# Altium PCB BM1397_TESTBED.PcbDoc
Units mm, origin at the board's own origin, x right, y up, seen from the top; angles counter-clockwise.
Board outline 120.02 x 120.02 mm, 2 copper layers (Top Layer, Bottom Layer); 70 components, 45 nets, 259 pads, 1007 vias.
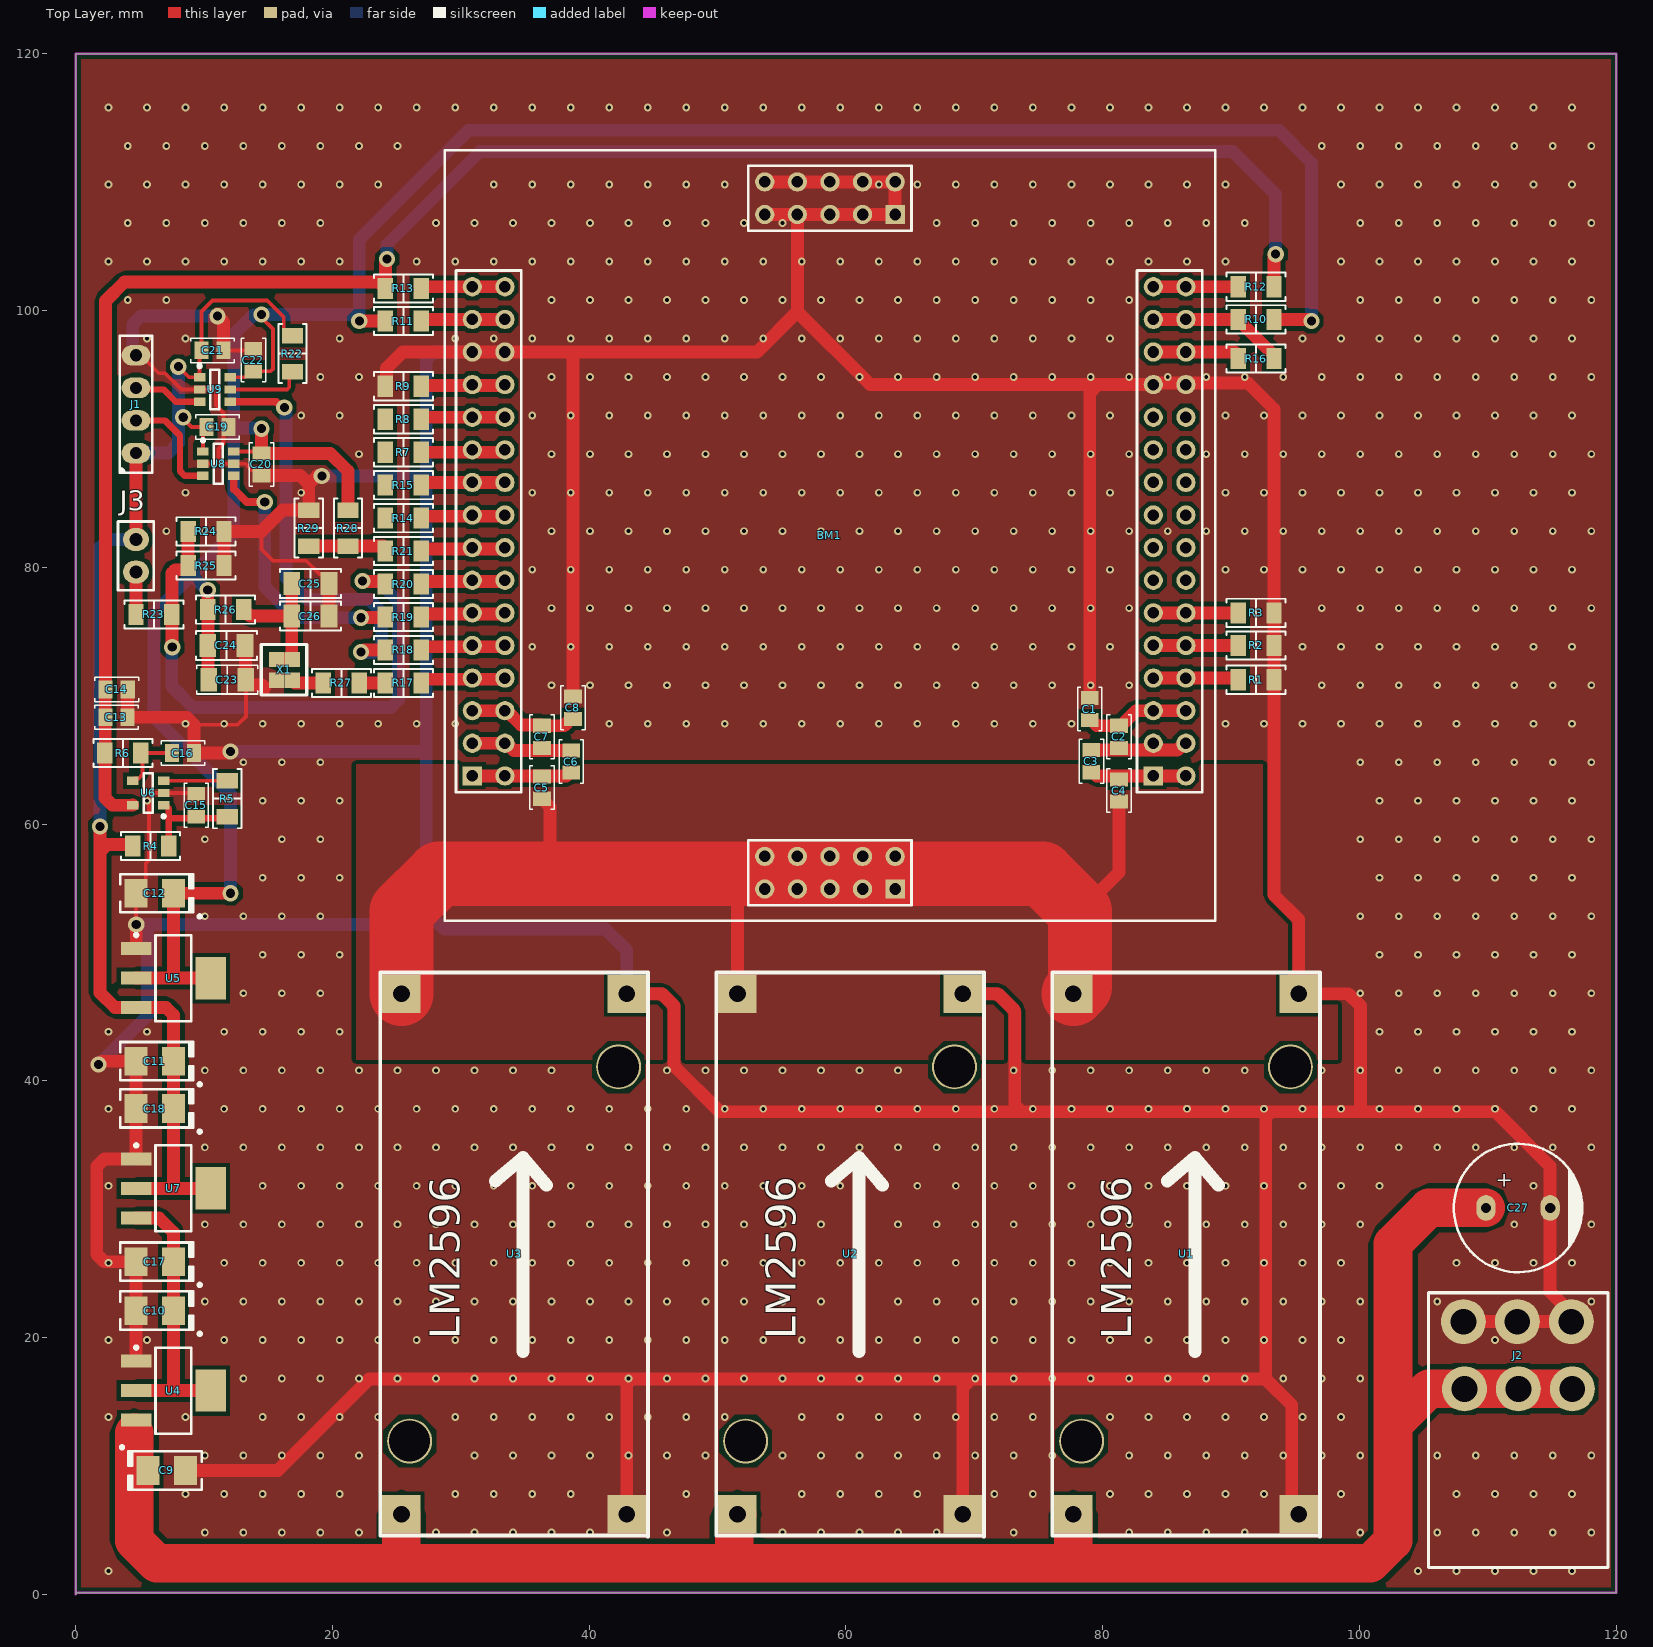
[diagram p0: Top Layer view]
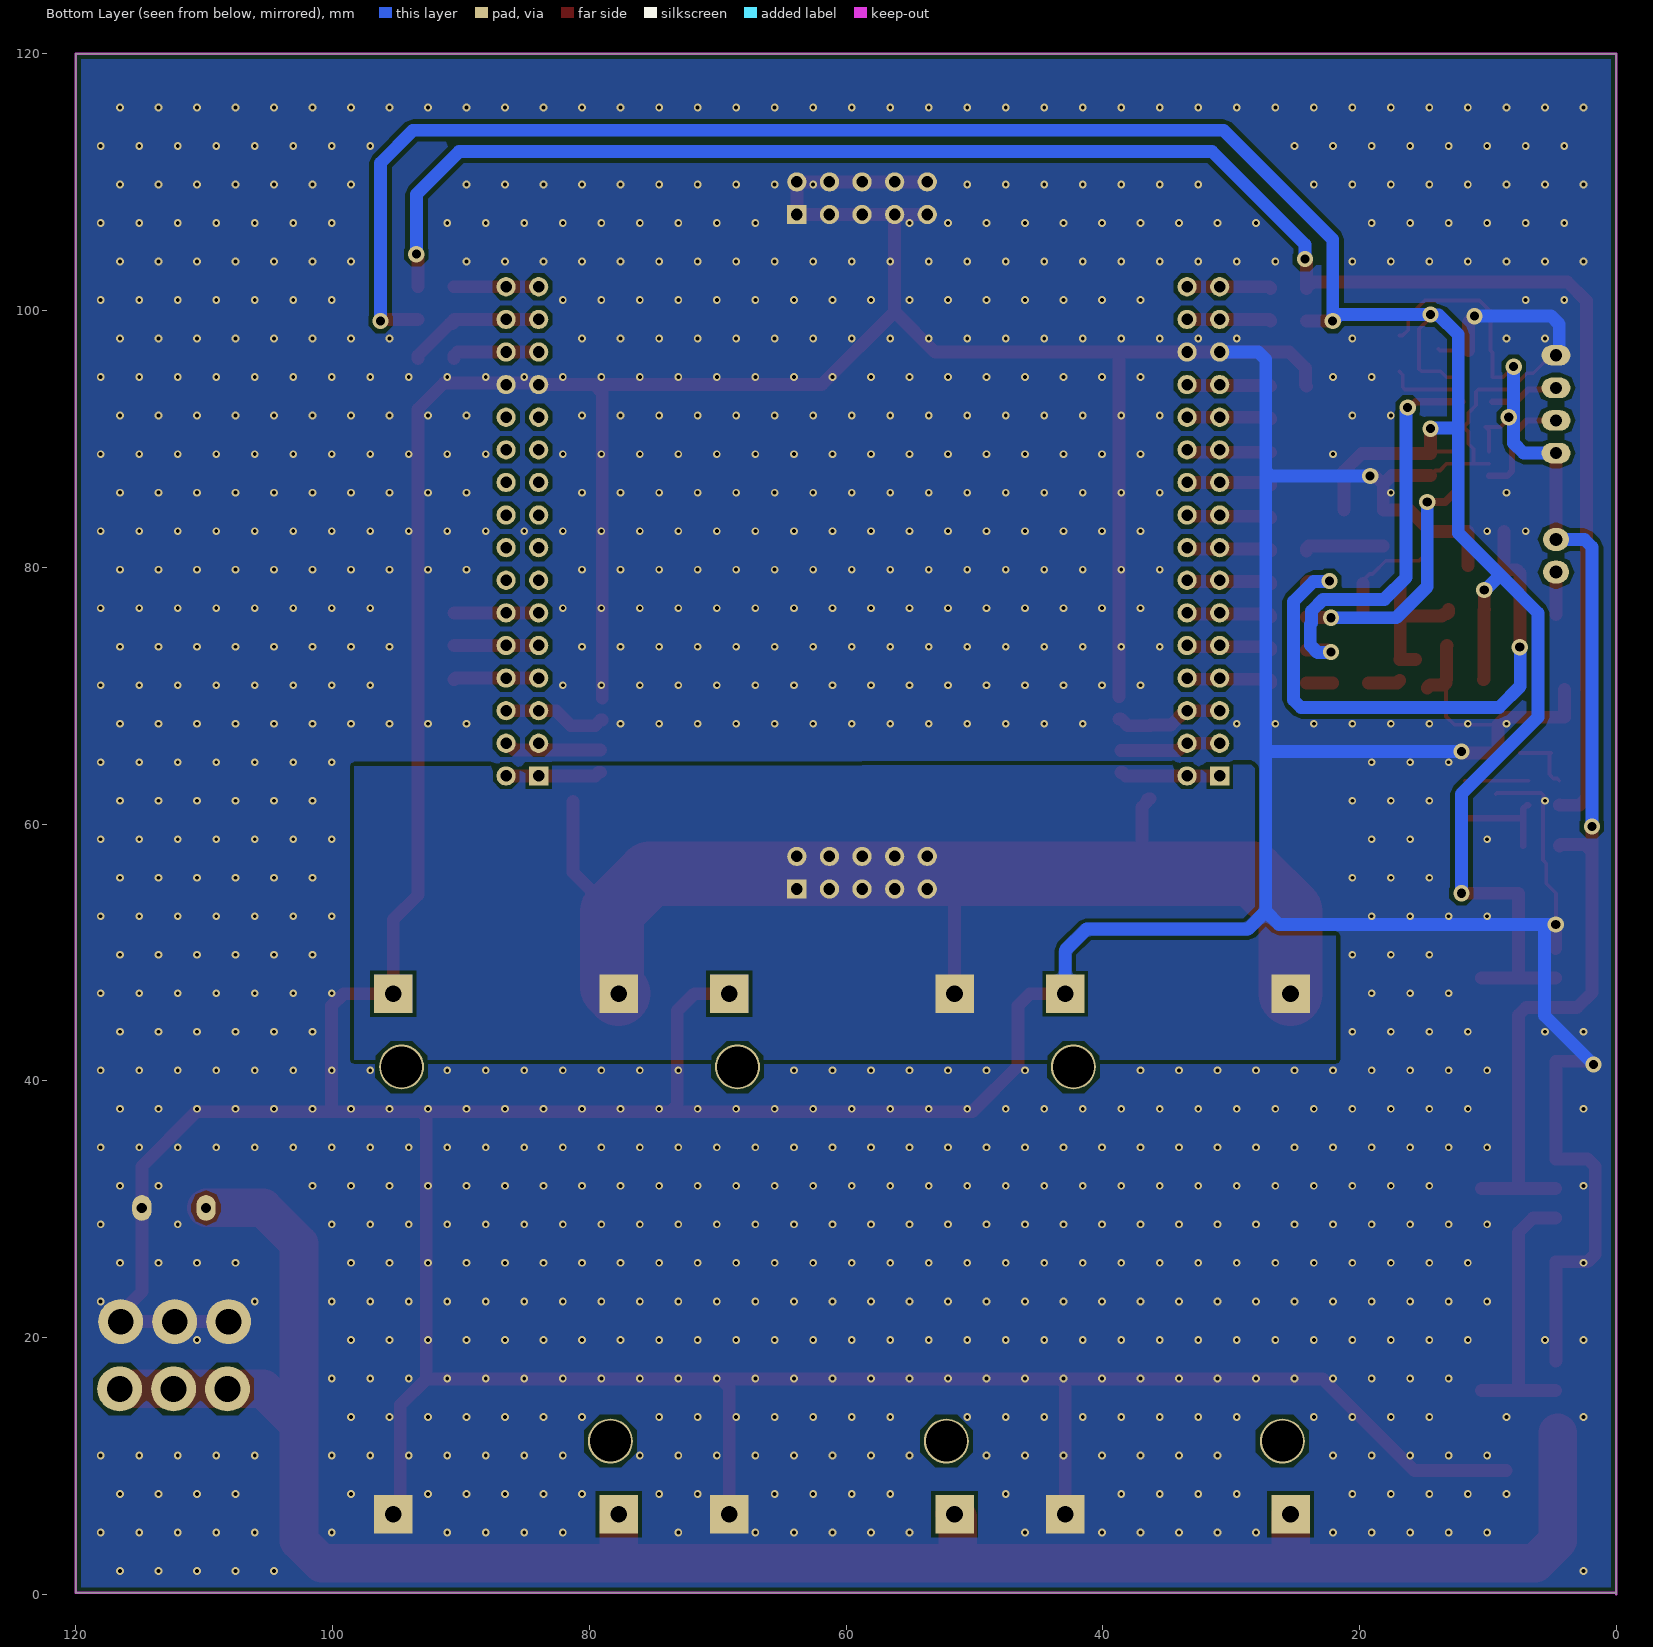
[diagram p1: Bottom Layer view, seen from below]
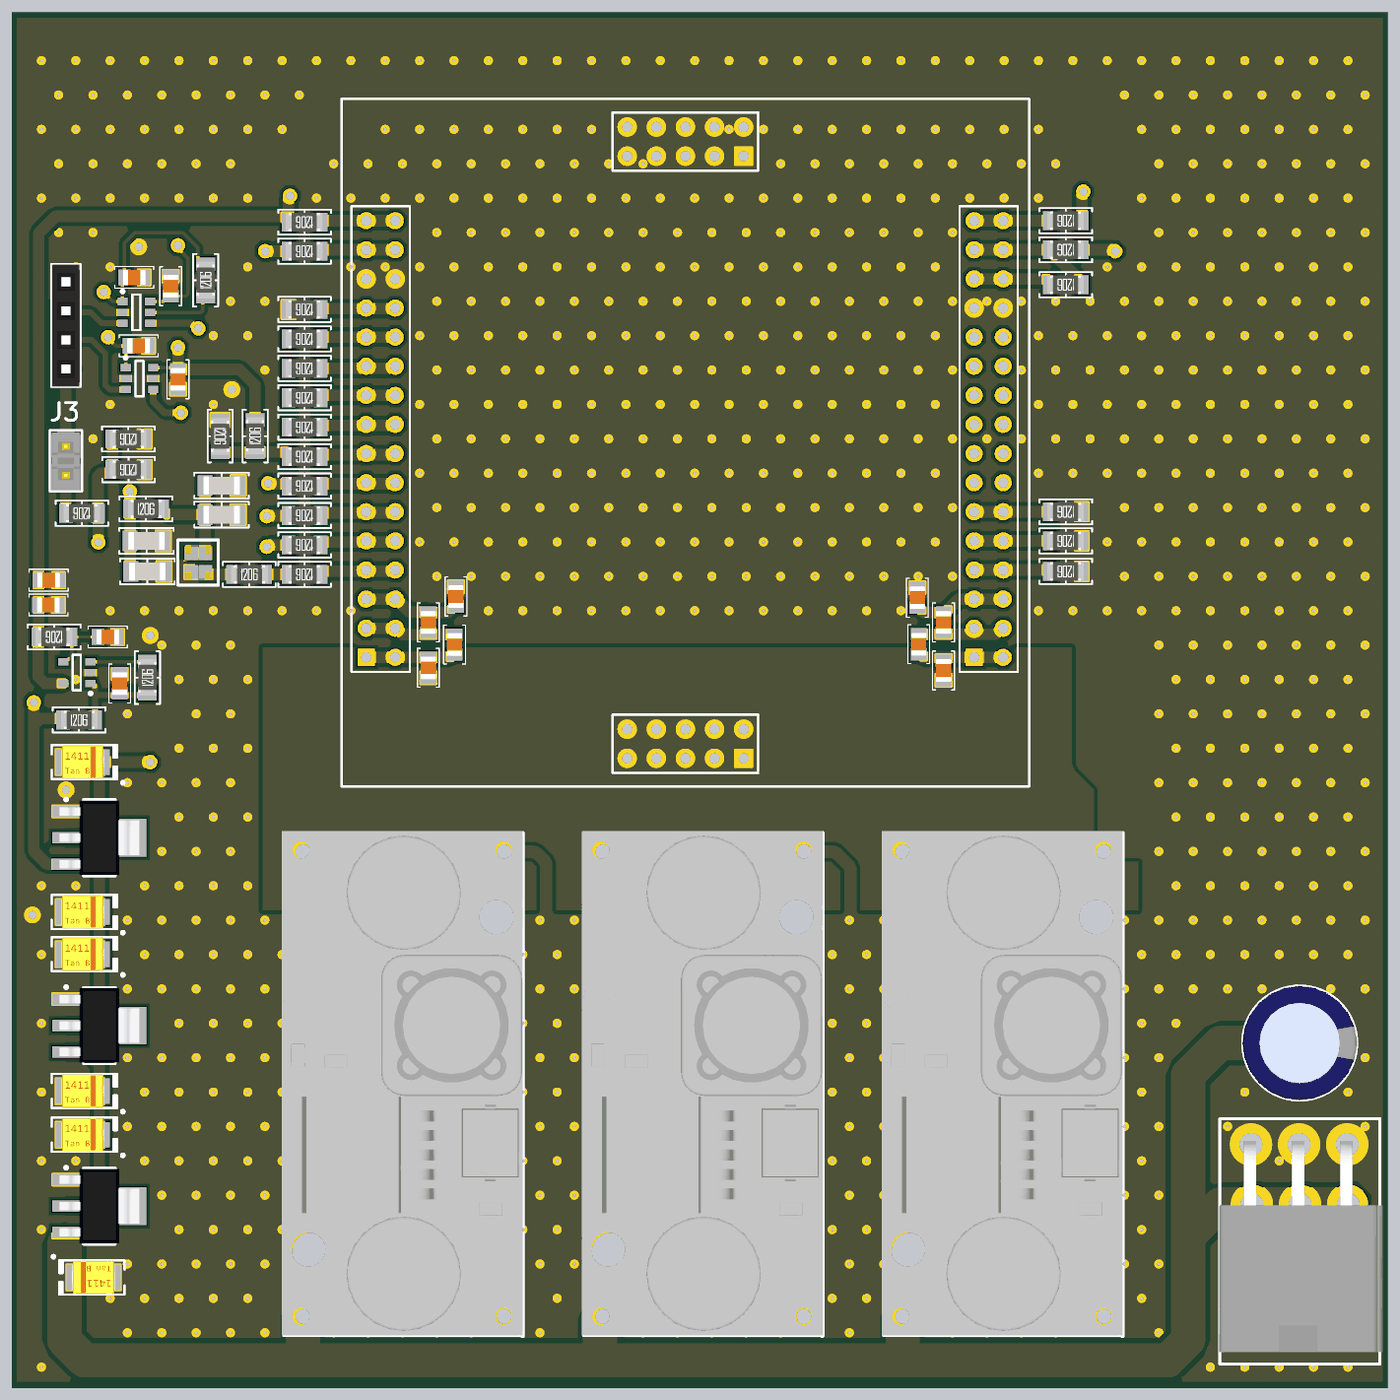
[diagram p2: 3D render of the assembled board from above, using the file's embedded part models]

## Layer stack, top to bottom
Top Solder: solder mask 0.0102, Solder Resist, Dk 3.5
Top Layer: signal copper 0.0356
Dielectric 1: dielectric 0.32, FR-4, Dk 4.8
Bottom Layer: signal copper 0.0356
Bottom Solder: solder mask 0.0102, Solder Resist, Dk 3.5

## Board outline
0,0 0,120.015 120.015,120.015 120.015,0.127 0,0.127

## Design rules (kind name [scope] priority, off if disabled: settings)
Clearance [All] p1: gap=0.3 ignorepadtopadclearanceinfootprint=FALSE
ComponentClearance [All] p1: gap=0 collisioncheckmode=3 verticalgap=2540 showdistances=FALSE
PolygonConnect [All] p1: connectstyle=Direct reliefconductorwidth=0.254 reliefentries=4 polygonreliefangle="90 Angle" airgapwidth=0.254
RoomDefinition BM1397_TESTBED [InComponentClass('BM1397_TESTBED')] p1: confinementstyle=ConfineOut formatcopy=TRUE lockcomponents=FALSE outline 177.165,186.944 445.516,186.944 445.516,314.452 177.165,314.452
RoutingVias [All] p1: holewidth=0.711 width=1.27 viastyle="Through Hole" minholewidth=0.711 minwidth=1.27 maxholewidth=0.711 maxwidth=1.27
SolderMaskExpansion [All] p1: expansion=0.102 istentingtop=FALSE
Width [All] p1: maxlimit=5 minlimit=0.3 preferedwidth=1
29 further rules are at their usual default settings.

## Components (designator, comment, footprint, x,y, rotation, side; value= is the part's Value field where it differs from the comment)
BM1 "BM1397" CONNECTOR 88.757,52.484 r180 top locked
C1 "1uF" CAP_SMD_0805 78.994,68.961 r270 top
C2 "1uF" CAP_SMD_0805 81.28,66.802 r270 top
C3 "1uF" CAP_SMD_0805 79.121,64.897 r270 top
C4 "1uF" CAP_SMD_0805 81.28,62.611 r270 top
C5 "1uF" CAP_SMD_0805 36.322,62.839 r90 top
C6 "1uF" CAP_SMD_0805 38.608,64.871 r90 top
C7 "1uF" CAP_SMD_0805 36.322,66.802 r90 top
C8 "1uF" CAP_SMD_0805 38.735,69.062 r90 top
C9 "10uF" CAP-TAN-CASE-B 7.112,9.652 r0 top
C10 "22uF" CAP-TAN-CASE-B 6.167,22.098 r180 top
C11 "10uF" CAP-TAN-CASE-B 6.167,41.529 r180 top
C12 "22uF" CAP-TAN-CASE-B 6.167,54.61 r180 top
C13 "10nF" CAP_SMD_0805 3.175,68.326 r180 top
C14 "1uF" CAP_SMD_0805 3.201,70.485 r180 top
C15 "1uF" CAP_SMD_0805 9.398,61.468 r270 top
C16 "10nF" CAP_SMD_0805 8.356,65.532 r180 top
C17 "10uF" CAP-TAN-CASE-B 6.167,25.908 r180 top
C18 "22uF" CAP-TAN-CASE-B 6.167,37.846 r180 top
C19 "1uF" CAP_SMD_0805 11.049,90.932 r180 top
C20 "1uF" CAP_SMD_0805 14.478,88.011 r270 top
C21 "1uF" CAP_SMD_0805 10.668,96.901 r180 top
C22 "1uF" CAP_SMD_0805 13.843,96.139 r90 top
C23 "120nF" CAP_SMD_1206 11.811,71.247 r0 top
C24 "1.2uF" CAP_SMD_1206 11.737,73.914 r0 top
C25 "120nF" CAP_SMD_1206 18.288,78.74 r0 top
C26 "1.2uF" CAP_SMD_1206 18.288,76.2 r0 top
C27 "1000uF" CAP_POL 112.355,30.099 r0 top
J1 "HEADRE1*4" HEADER-1x4 4.699,92.71 r90 top
J2 "ATX_6_PIN" "ATX 6" 112.346,18.625 r0 top
J3 "jumper" jumper_2pin 4.699,80.899 r270 top
R1 "0R" RES-SMD-1206 91.948,71.247 r180 top
R2 "0R" RES-SMD-1206 91.948,73.914 r180 top
R3 "0R" RES-SMD-1206 91.948,76.454 r180 top
R4 "4.99R" RES-SMD-1206 5.842,58.293 r0 top
R5 "10K" RES-SMD-1206 11.811,61.979 r90 top
R6 "0R" RES-SMD-1206 3.683,65.532 r180 top
R7 "0R" RES-SMD-1206 25.527,88.971 r180 top
R8 "0R" RES-SMD-1206 25.527,91.539 r180 top
R9 "0R" RES-SMD-1206 25.527,94.107 r180 top
R10 "0R" RES-SMD-1206 91.948,99.314 r180 top
R11 "0R" RES-SMD-1206 25.527,99.187 r180 top
R12 "0R" RES-SMD-1206 91.948,101.854 r180 top
R13 "0R" RES-SMD-1206 25.527,101.727 r180 top
R14 "0R" RES-SMD-1206 25.527,83.834 r180 top
R15 "0R" RES-SMD-1206 25.527,86.402 r180 top
R16 "0R" RES-SMD-1206 91.948,96.266 r180 top
R17 "0R" RES-SMD-1206 25.527,70.993 r180 top
R18 "0R" RES-SMD-1206 25.527,73.561 r180 top
R19 "0R" RES-SMD-1206 25.527,76.129 r180 top
R20 "0R" RES-SMD-1206 25.527,78.698 r180 top
R21 "0R" RES-SMD-1206 25.527,81.266 r180 top
R22 "4.7K" RES-SMD-1206 16.891,96.647 r90 top
R23 "3.3K" RES-SMD-1206 6.099,76.327 r180 top
R24 "3.3K" RES-SMD-1206 10.157,82.804 r180 top
R25 "4.7K" RES-SMD-1206 10.16,80.137 r180 top
R26 "0R" RES-SMD-1206 11.684,76.708 r0 top
R27 "0R" RES-SMD-1206 20.698,70.993 r0 top
R28 "0R" RES-SMD-1206 21.209,83.058 r90 top
R29 "0R" RES-SMD-1206 18.161,83.058 r270 top
U1 "LM2596S" LM2596S 96.919,4.588 r90 top
U2 "LM2596S" LM2596S 70.75,4.588 r90 top
U3 "LM2596S" LM2596S 44.581,4.588 r90 top
U4 "AMS1117" AMS1117 7.62,15.875 r270 top
U5 "AMS1117" AMS1117 7.62,48.006 r270 top
U6 "SGM2036" SOT23-5PIN 5.654,62.427 r180 top
U7 "AMS1117" AMS1117 7.62,31.623 r270 top
U8 "LEVER SHIFTER" SOT23-6PIN 11.119,88.072 r0 top
U9 "LEVER SHIFTER" SOT23-6PIN 10.852,93.853 r0 top
X1 "25MHz" XTALL 16.256,72.009 r90 top

## Footprints (in the part's own frame and the unit in brackets; to place one, negate y for a bottom-side part, rotate by r counter-clockwise, add the part's x,y. Pads: shape width x height; smd on the part's side, far side on the other; paste and mask are expansions set on the pad)
AMS1117 [mm]
  rect 1x2.4 smd: 1(-2.3,-2.9) 2(0,-2.9) 3(2.3,-2.9)
  rect 3.3x2.4 smd: 4(0,2.9)
  silkscreen extent -3.47,-3.02 3.35,1.4, body extent -3.24,-3.49 3.24,3.49, height 1.64
"ATX 6" [mm]
  round 3.5 hole 2: 1(-4.159,-2.623) 2(0.041,-2.623) 3(4.24,-2.623) 4(4.16,2.623) 5(-0.04,2.623) 6(-4.24,2.623)
  silkscreen extent -6.96,-16.52 7.01,4.88, body extent -7.02,-15.49 7.28,2.94, height 11.1
CAP-TAN-CASE-B [mm]
  rect 1.8x2.23 smd: 1(-1.46,0) 2(1.46,0)
  silkscreen extent -3.62,-1.5 2.71,1.92, body extent -1.87,-1.45 1.86,1.45, height 2
CAP_POL [mm]
  oval 1.5x2 hole 0.8: 1(-2.5,0) 2(2.5,0)
  silkscreen extent -5,-5 5,5, body extent -5,-5 5,5, height 12.7
CAP_SMD_0805 [mm]
  rect 1.1x1.38 smd: 1(-0.863,0) 2(0.863,0)
  silkscreen extent -1.7,-0.95 1.7,0.95, body extent -1,-0.67 1,0.67, height 0.63
CAP_SMD_1206 [mm]
  rect 1.3x1.8 smd: 1(-1.45,0) 2(1.45,0)
  silkscreen extent -2.37,-1.12 2.37,1.12, body extent -1.6,-0.8 1.6,0.8, height 1.2
CONNECTOR [mm]
  round 1.5 hole 0.9: 1(2.27,-11.27) 2(2.27,-13.81) 2(4.81,-13.81) 3(2.27,-16.35) 3(4.81,-16.35) 4(2.27,-18.89) 4(4.81,-18.89) 5(2.27,-21.43) 5(4.81,-21.43) 6(2.27,-23.97) 6(4.81,-23.97) 7(2.27,-26.51) 7(4.81,-26.51) 8(2.27,-29.05) 8(4.81,-29.05) 9(2.27,-31.59) 9(4.81,-31.59) 10(2.27,-34.13) 10(4.81,-34.13) 11(2.27,-36.67) 11(4.81,-36.67) 12(2.27,-39.21) 12(4.81,-39.21) 13(2.27,-41.75) 13(4.81,-41.75) 14(2.27,-44.29) 14(4.81,-44.29) 15(2.27,-46.83) 15(4.81,-46.83) 16(2.27,-49.37) 16(4.81,-49.37) 17(55.317,-49.37) 17(57.857,-49.37) 18(55.317,-46.83) 18(57.857,-46.83) 19(55.317,-44.29) 19(57.857,-44.29) 20(55.317,-41.75) 20(57.857,-41.75) 21(55.317,-39.21) 21(57.857,-39.21) 22(55.317,-36.67) 22(57.857,-36.67) 23(55.317,-34.13) 23(57.857,-34.13) 24(55.317,-31.59) 24(57.857,-31.59) 25(55.317,-29.05) 25(57.857,-29.05) 26(55.317,-26.51) 26(57.857,-26.51) 27(55.317,-23.97) 27(57.857,-23.97) 28(55.317,-21.43) 28(57.857,-21.43) 29(55.317,-18.89) 29(57.857,-18.89) 30(55.317,-16.35) 30(57.857,-16.35) 31(55.317,-13.81) 31(57.857,-13.81) 32(55.317,-11.27) 33(24.92,-57.54) 33(27.46,-57.54) 33(27.46,-55) 33(30,-57.54) 33(30,-55) 33(32.54,-57.54) 33(32.54,-55) 33(35.08,-57.54) 33(35.08,-55) 34(24.92,-5) 34(27.46,-5) 34(27.46,-2.46) 34(30,-5) 34(30,-2.46) 34(32.54,-5) 34(32.54,-2.46) 34(35.08,-5) 34(35.08,-2.46)
  rect 1.5x1.5 hole 0.9: 1(4.81,-11.27) 32(57.857,-11.27) 33(24.92,-55) 34(24.92,-2.46)
  silkscreen extent 0,-60 60,0
HEADER-1x4 [mm]
  oval 1.6x2.25 hole 0.95: 1(-3.81,0) 2(-1.27,0) 3(1.27,0) 4(3.81,0)
  silkscreen extent -5.34,-1.27 5.34,1.27, body extent -5.33,-1.21 5.33,1.21, height 8.51
jumper_2pin [mil]
  oval 70x80 hole 40: 1(-50,0) 2(50,0)
  silkscreen extent -105,-55 105,55, body extent -100,-50 100,50, height 337
LM2596S [mm]
  round 3.5 hole 3.2: 0(7.35,18.56) 0(36.5,2.29)
  rect 3x3 hole 1.3: 1(1.65,19.2) 2(1.65,1.65) 3(42.2,19.2) 4(42.2,1.65)
  silkscreen extent -0.08,0 43.85,20.85, body extent 0,0.03 44,21.03, height 12.68
RES-SMD-1206 [mm]
  rect 1.2x1.65 smd: 1(-1.4,0) 2(1.4,0)
  silkscreen extent -2.3,-1.1 2.3,1.1, body extent -1.57,-0.8 1.63,0.8, height 0.6
SOT23-5PIN [mm]
  rect 0.9x0.65 smd: 1(-1.2,0.95) 2(-1.2,0) 3(-1.2,-0.95) 4(1.2,-0.95) 5(1.2,0.95)
  silkscreen extent -1.33,-1.55 0.35,1.95, body extent -0.9,-1.55 0.9,1.55, height 1.45
SOT23-6PIN [mm]
  rect 0.9x0.65 smd: 1(-1.2,0.95) 2(-1.2,0) 3(-1.2,-0.95) 4(1.2,-0.95) 5(1.2,0) 6(1.2,0.95)
  silkscreen extent -1.32,-1.55 0.35,1.95, body extent -0.9,-1.55 0.9,1.55, height 1.45
XTALL [mm]
  rect 1.2x1.2 smd: 1(0.813,-0.612) 2(-0.813,0.613) 3(-0.813,-0.612) 4(0.813,0.613)
  silkscreen extent -1.96,-1.76 1.98,1.8, body extent -1.6,-1.27 1.6,1.23, height 0.87

## Part data
BM1: library part BM1397_0
C1 C2 C3 C4 C5 C6 C7 C8 C13 C14 C15 C16 C19 C20 C21 C22 C23 C24 C25 C26: library part CAP
C9 C10 C11 C12 C17 C18 C27: library part "POLARIZED CAP"
J1: library part HEADER-1x4
J2: "ATX PWR CONN 6 PIN"
J3: library part Jumper_2
R1 R2 R3 R4 R5 R6 R7 R8 R9 R10 R11 R12 R13 R14 R15 R16 R17 R18 R19 R20 R21 R22 R23 R24 R25 R26 R27 R28 R29: library part RES
U1 U2 U3: library part LM2596s, "DC-DC CONVERTER"
U8 U9: library part SN74LVC1T45
X1: library part XTALL

## Via types
v1: diameter 0.6, hole 0.3, Top Layer to Bottom Layer, 985 vias
v2: diameter 1.27, hole 0.711, Top Layer to Bottom Layer, 22 vias

## Nets (pads, with @x,y where several pads share a name; then routed paths per layer and width w, separated by ;. In a path a pad name is that pad's centre, name@x,y a point inside that pad or via, vN(x,y) a via of type N, cw(c..) or ccw(c..) an arc to the next point about the centre after c; other vN are vias at no path point)
0.8V: C13.2 C14.2 R6.2 R12.1 R13.2 U6.5 | length 148
  Top Layer w1: U6.5 4.445,61.468 2.869,61.468 2.283,62.054 R6.2 2.31,65.56 C13.2 2.31,70.457 C14.2 2.338,100.763 3.81,102.235 23.619,102.235 23.802,102.052 24.027,102.052 R13.2@24.127,101.952 ; R13.2 R13.2@24.127,101.952 ; v2(24.257,104.013) 24.257,103.94 24.127,103.81 R13.2@24.127,101.952 ; R12.1 93.348,104.27 v2(93.472,104.394)
  Bottom Layer w1: v2(24.257,104.013) 24.257,105.156 31.496,112.395 90.14,112.395 93.472,109.063 v2(93.472,104.394)
1.8V: C12.1 C20.1 C22.1 C23.1 C24.1 R10.1 R11.2 R26.1 R28.2 U5.2 U5.4 U8.6 U9.6 | length 212.2
  Top Layer w0.3: U9.6 13.23,94.803 13.703,95.276 C22.1 15.191,95.276 15.367,95.452 15.367,98.552 14.478,99.441 v2(14.478,99.695) ; U8.6 14.33,89.022 C20.1
  Top Layer w1: U5.2 7.366,48.006 ; v2(10.287,78.232) 10.287,76.711 R26.1 10.323,76.67 10.323,71.285 C23.1 ; U5.4 7.366,48.006 ; v2(12.065,54.61) C12.1 7.627,48.267 7.366,48.006 ; v2(14.478,90.805) C20.1 19.838,88.874 21.209,87.503 R28.2 ; v2(22.098,99.187) R11.2 ; R10.1 96.066,99.314 96.193,99.187 v2(96.266,99.187)
  Bottom Layer w1: v2(10.287,78.232) 10.214,78.232 9.134,79.311 8.954,79.311 ; v2(12.065,54.61) 12.065,62.357 6.096,68.326 6.096,76.454 8.954,79.311 ; v2@14.405,99.695 14.353,99.643 13.835,99.643 12.319,98.128 12.319,91.059 ; v2(14.478,90.805) 14.426,90.857 12.521,90.857 12.319,91.059 ; v2(14.478,99.695) 21.517,99.695 22.025,99.187 v2(22.098,99.187) 22.098,105.537 30.607,114.046 93.726,114.046 96.266,111.506 v2(96.266,99.187) ; 8.954,79.311 12.319,82.677 12.319,91.059
3.3V: C11.1 C18.1 C19.2 C21.2 J1.1 J3.1 R4.1 R22.2 U5.3 U7.2 U7.4 U8.1 U9.1 | length 103.3
  Top Layer w0.3: v2(8.001,95.631) 8.829,94.803 U9.1 9.652,96.748 C21.2 9.805,99.922 10.663,100.78 14.927,100.78 16.216,99.491 16.216,98.497 16.666,98.047 R22.2 ; v2(8.382,91.694) 8.382,91.567 9.017,90.932 C19.2 9.919,90.665 U8.1
  Top Layer w1: v2(1.905,59.817) 1.905,57.834 ; R4.1 4.442,58.32 4.342,58.42 2.491,58.42 1.905,57.834 ; J3.1 J1.1 ; U7.2 7.493,31.623 ; U7.4 7.493,31.623 ; 1.905,57.834 1.905,46.863 3.062,45.706 U5.3 6.199,45.706 6.213,45.72 7.041,45.72 7.627,45.134 C11.1 C18.1 7.627,31.757 7.493,31.623
  Bottom Layer w1: v2(1.905,59.817) 1.905,81.583 2.491,82.169 J3.1 ; J1.1 7.239,88.9 8.001,89.662 v2(8.001,95.631)
5V: C10.1 C17.1 U4.2 U4.4 U7.3 | length 21.5
  Top Layer w1: U4.2 7.62,15.875 ; U7.3 6.491,29.323 7.627,28.187 C17.1 7.62,25.901 7.62,15.875 ; U4.4 7.62,15.875
CLK: R17.2 R27.2 | length 2
  Top Layer w1: R27.2 R17.2
GND: BM1.13 BM1.19 BM1.33 C1.1 C8.2 C9.2 C10.2 C11.2 C12.2 C13.1 C14.1 C15.1 C16.1 C17.2 C18.2 C19.1 C20.2 C21.1 C22.2 C23.2 C24.2 C25.2 C26.2 C27.2 J1.4 J2.4 J2.5 J2.6 R1.1 R2.1 R3.1 R9.2 R24.1 R25.1 R29.1 U1.2 U1.4 U2.2 U2.4 U3.2 U3.4 U4.1 U5.1 U6.2 U7.1 U8.2 U8.5 U9.2 X1.2 | length 732.3
  Top Layer w0.3: J1.4 5.08,96.52 6.477,95.123 6.975,95.123 8.245,93.853 U9.2 10.746,93.853 10.922,93.677 10.922,92.622 11.512,92.032 11.512,91.332 C19.1 11.512,90.532 11.512,89.626 11.119,89.233 11.119,88.072 ; v2@4.707,52.197 C12.2 5.457,55.36 5.457,56.932 5.715,57.19 5.715,61.976 5.688,62.003 5.688,62.251 5.864,62.427 U6.2 9.302,62.427 C15.1 ; 9.219,67.74 12.622,67.74 13.261,68.379 13.261,70.997 C23.2 ; U8.2 11.119,88.072 ; C21.1 13.742,96.901 C22.2 ; 14.475,82.804 14.475,81.41 15.367,80.518 17.96,80.518 18.988,79.49 19.238,79.49 19.738,78.99 C25.2 ; C20.2 14.078,87.548 13.743,87.548 13.219,88.072 U8.5 11.119,88.072
  Top Layer w1: v2(1.778,41.275) 2.032,41.529 C11.2 C18.2 U7.1@4.707,33.923 ; C14.1 4.051,70.472 4.051,68.339 C13.1 8.633,68.326 9.219,67.74 C16.1 11.865,65.532 11.992,65.659 v2(12.065,65.659) ; v2@4.707,52.197 v2(4.72,52.184) U5.1 ; U4.1 4.714,18.175 4.714,25.902 C17.2 2.237,25.908 1.651,26.494 1.651,33.337 2.237,33.923 U7.1 ; C9.2 15.748,9.652 22.86,16.764 v1@43.307,16.764 ; v2(11.049,99.568) 11.531,99.086 C21.1 ; R25.1 11.558,80.138 11.558,82.803 R24.1 14.475,82.804 16.129,84.458 R29.1 18.161,86.487 ; C24.2 13.224,73.877 13.224,71.284 C23.2 ; C23.2@13.261,70.997 13.411,70.847 14.497,70.847 14.732,70.612 ; C20.2 17.5,87.148 18.161,86.487 ; v2(19.177,87.122) 18.796,87.122 18.161,86.487 ; C26.2 C25.2 ; R9.2 24.227,94.207 24.227,95.523 25.478,96.774 30.9,96.774 33.44,96.774 38.862,96.774 ; C8.2 38.735,96.647 38.862,96.774 ; U3.2 42.931,16.388 v1@43.307,16.764 ; U3.4 45.668,46.788 46.609,45.847 46.609,41.148 50.165,37.592 73.66,37.592 ; BM1.33@53.677,107.484 BM1.33@56.217,107.484 ; BM1.33@53.677,110.024 56.217,110.024 58.757,110.024 61.297,110.024 63.837,110.024 63.837,107.484 61.297,107.484 58.757,107.484 BM1.33@56.217,107.484 ; U2.2 69.1,16.141 69.723,16.764 ; U2.4 71.83,46.788 73.152,45.466 73.152,38.1 73.66,37.592 ; C1.1 78.994,93.599 79.629,94.234 ; U1.2 94.726,6.781 94.726,14.748 92.71,16.764 ; J2.6 J2.5 J2.4 116.505,21.924 114.855,23.574 C27.2 114.855,33.354 110.617,37.592 100.076,37.592 ; 38.862,96.774 53.086,96.774 56.217,99.905 ; v1@43.307,16.764 69.723,16.764 ; 56.217,99.905 61.888,94.234 79.629,94.234 ; 56.217,99.905 BM1.33@56.217,107.484 ; 69.723,16.764 92.71,16.764 ; 73.66,37.592 93.091,37.592 ; 79.629,94.234 83.947,94.234 83.82,94.361 91.313,94.361 93.348,92.326 R3.1 R2.1 R1.1 93.348,54.48 95.269,52.559 U1.4 99.135,46.788 100.076,45.847 100.076,37.592 ; 92.71,16.764 92.71,37.211 93.091,37.592 ; 93.091,37.592 100.076,37.592
  Bottom Layer w1: v2(1.778,41.275) 5.588,45.085 5.588,52.184 ; J1.4 4.445,96.774 4.445,98.933 5.08,99.568 v2(11.049,99.568) ; v2(4.72,52.184) 5.588,52.184 ; v2(12.065,65.659) 27.051,65.659 27.305,65.913 ; v2(19.177,87.122) 26.924,87.122 27.305,87.503 ; BM1.19@30.9,96.774 27.891,96.774 27.305,96.188 27.305,87.503 ; U3.4 42.926,46.793 42.926,50.165 41.275,51.816 28.702,51.816 27.305,53.213 ; 5.588,52.184 26.276,52.184 27.305,53.213 ; 27.305,53.213 27.305,65.913 ; 27.305,65.913 27.305,87.503
  other v1: 2.565,1.82 104.565,1.82 107.565,1.82 110.565,1.82 113.565,1.82 116.565,1.82 10.065,4.82 13.065,4.82 16.065,4.82 19.065,4.82 22.065,4.82 28.065,4.82 31.065,4.82 34.065,4.82 37.065,4.82 40.065,4.82 46.065,4.82 55.065,4.82 58.065,4.82 61.065,4.82 64.065,4.82 67.065,4.82 73.065,4.82 82.065,4.82 85.065,4.82 88.065,4.82 91.065,4.82 100.065,4.82 106.065,4.82 109.065,4.82 112.065,4.82 115.065,4.82 118.065,4.82 8.565,7.82 11.565,7.82 14.565,7.82 17.565,7.82 20.565,7.82 29.565,7.82 32.565,7.82 35.565,7.82 38.565,7.82 47.565,7.82 56.565,7.82 59.565,7.82 62.565,7.82 65.565,7.82 71.565,7.82 74.565,7.82 80.565,7.82 83.565,7.82 86.565,7.82 89.565,7.82 92.565,7.82 98.565,7.82 107.565,7.82 110.565,7.82 113.565,7.82 116.565,7.82 10.065,10.82 13.065,10.82 16.065,10.82 19.065,10.82 22.065,10.82 31.065,10.82 34.065,10.82 37.065,10.82 40.065,10.82 43.065,10.82 46.065,10.82 49.065,10.82 55.065,10.82 58.065,10.82 61.065,10.82 64.065,10.82 67.065,10.82 70.065,10.82 73.065,10.82 76.065,10.82 82.065,10.82 85.065,10.82 88.065,10.82 91.065,10.82 94.065,10.82 97.065,10.82 100.065,10.82 106.065,10.82 109.065,10.82 112.065,10.82 115.065,10.82 118.065,10.82 2.565,13.82 8.565,13.82 14.565,13.82 17.565,13.82 20.565,13.82 23.565,13.82 29.565,13.82 32.565,13.82 35.565,13.82 38.565,13.82 41.565,13.82 44.565,13.82 47.565,13.82 50.565,13.82 56.565,13.82 59.565,13.82 62.565,13.82 65.565,13.82 68.565,13.82 71.565,13.82 74.565,13.82 80.565,13.82 83.565,13.82 86.565,13.82 89.565,13.82 92.565,13.82 95.565,13.82 98.565,13.82 13.065,16.82 16.065,16.82 19.065,16.82 22.065,16.82 25.065,16.82 28.065,16.82 31.065,16.82 34.065,16.82 37.065,16.82 40.065,16.82 43.065,16.82 46.065,16.82 49.065,16.82 52.065,16.82 55.065,16.82 58.065,16.82 61.065,16.82 64.065,16.82 67.065,16.82 70.065,16.82 73.065,16.82 76.065,16.82 79.065,16.82 82.065,16.82 85.065,16.82 88.065,16.82 91.065,16.82 94.065,16.82 97.065,16.82 100.065,16.82 2.565,19.82 5.565,19.82 11.565,19.82 14.565,19.82 17.565,19.82 20.565,19.82 23.565,19.82 26.565,19.82 29.565,19.82 32.565,19.82 35.565,19.82 38.565,19.82 41.565,19.82 44.565,19.82 47.565,19.82 50.565,19.82 53.565,19.82 56.565,19.82 59.565,19.82 62.565,19.82 65.565,19.82 68.565,19.82 71.565,19.82 74.565,19.82 77.565,19.82 80.565,19.82 83.565,19.82 86.565,19.82 89.565,19.82 92.565,19.82 95.565,19.82 98.565,19.82 110.565,19.82 10.065,22.82 13.065,22.82 16.065,22.82 19.065,22.82 22.065,22.82 25.065,22.82 28.065,22.82 31.065,22.82 34.065,22.82 37.065,22.82 40.065,22.82 43.065,22.82 46.065,22.82 49.065,22.82 52.065,22.82 55.065,22.82 58.065,22.82 61.065,22.82 64.065,22.82 67.065,22.82 70.065,22.82 73.065,22.82 76.065,22.82 79.065,22.82 82.065,22.82 85.065,22.82 88.065,22.82 91.065,22.82 94.065,22.82 97.065,22.82 100.065,22.82 106.065,22.82 118.065,22.82 2.565,25.82 11.565,25.82 14.565,25.82 17.565,25.82 20.565,25.82 23.565,25.82 26.565,25.82 29.565,25.82 32.565,25.82 35.565,25.82 38.565,25.82 41.565,25.82 44.565,25.82 47.565,25.82 50.565,25.82 53.565,25.82 56.565,25.82 59.565,25.82 62.565,25.82 65.565,25.82 68.565,25.82 71.565,25.82 74.565,25.82 77.565,25.82 80.565,25.82 83.565,25.82 86.565,25.82 89.565,25.82 92.565,25.82 95.565,25.82 98.565,25.82 107.565,25.82 110.565,25.82 113.565,25.82 116.565,25.82 10.065,28.82 13.065,28.82 16.065,28.82 19.065,28.82 22.065,28.82 25.065,28.82 28.065,28.82 31.065,28.82 34.065,28.82 37.065,28.82 40.065,28.82 43.065,28.82 46.065,28.82 49.065,28.82 52.065,28.82 55.065,28.82 58.065,28.82 61.065,28.82 64.065,28.82 67.065,28.82 70.065,28.82 73.065,28.82 76.065,28.82 79.065,28.82 82.065,28.82 85.065,28.82 88.065,28.82 91.065,28.82 94.065,28.82 97.065,28.82 100.065,28.82 112.065,28.82 118.065,28.82 2.565,31.82 14.565,31.82 17.565,31.82 20.565,31.82 23.565,31.82 26.565,31.82 29.565,31.82 32.565,31.82 35.565,31.82 38.565,31.82 41.565,31.82 44.565,31.82 47.565,31.82 50.565,31.82 53.565,31.82 56.565,31.82 59.565,31.82 62.565,31.82 65.565,31.82 68.565,31.82 71.565,31.82 74.565,31.82 77.565,31.82 80.565,31.82 83.565,31.82 86.565,31.82 89.565,31.82 92.565,31.82 95.565,31.82 98.565,31.82 101.565,31.82 113.565,31.82 116.565,31.82 10.065,34.82 13.065,34.82 16.065,34.82 19.065,34.82 22.065,34.82 25.065,34.82 28.065,34.82 31.065,34.82 34.065,34.82 37.065,34.82 40.065,34.82 43.065,34.82 46.065,34.82 49.065,34.82 52.065,34.82 55.065,34.82 58.065,34.82 61.065,34.82 64.065,34.82 67.065,34.82 70.065,34.82 73.065,34.82 76.065,34.82 79.065,34.82 82.065,34.82 85.065,34.82 88.065,34.82 91.065,34.82 94.065,34.82 97.065,34.82 100.065,34.82 103.065,34.82 106.065,34.82 109.065,34.82 112.065,34.82 115.065,34.82 118.065,34.82 2.565,37.82 11.565,37.82 14.565,37.82 17.565,37.82 20.565,37.82 23.565,37.82 26.565,37.82 29.565,37.82 32.565,37.82 35.565,37.82 38.565,37.82 41.565,37.82 44.565,37.82 47.565,37.82 50.565,37.82 53.565,37.82 56.565,37.82 59.565,37.82 62.565,37.82 65.565,37.82 68.565,37.82 71.565,37.82 74.565,37.82 77.565,37.82 80.565,37.82 83.565,37.82 86.565,37.82 89.565,37.82 92.565,37.82 95.565,37.82 98.565,37.82 101.565,37.82 104.565,37.82 107.565,37.82 110.565,37.82 113.565,37.82 116.565,37.82 10.065,40.82 13.065,40.82 16.065,40.82 19.065,40.82 22.065,40.82 25.065,40.82 28.065,40.82 31.065,40.82 34.065,40.82 37.065,40.82 46.065,40.82 49.065,40.82 52.065,40.82 55.065,40.82 58.065,40.82 61.065,40.82 64.065,40.82 73.065,40.82 76.065,40.82 79.065,40.82 82.065,40.82 85.065,40.82 88.065,40.82 91.065,40.82 97.065,40.82 100.065,40.82 103.065,40.82 106.065,40.82 109.065,40.82 112.065,40.82 115.065,40.82 118.065,40.82 2.565,43.82 5.565,43.82 11.565,43.82 14.565,43.82 17.565,43.82 20.565,43.82 101.565,43.82 104.565,43.82 107.565,43.82 110.565,43.82 113.565,43.82 116.565,43.82 13.065,46.82 16.065,46.82 19.065,46.82 100.065,46.82 103.065,46.82 106.065,46.82 109.065,46.82 112.065,46.82 115.065,46.82 118.065,46.82 14.565,49.82 17.565,49.82 20.565,49.82 101.565,49.82 104.565,49.82 107.565,49.82 110.565,49.82 113.565,49.82 116.565,49.82 10.065,52.82 13.065,52.82 16.065,52.82 19.065,52.82 100.065,52.82 103.065,52.82 106.065,52.82 109.065,52.82 112.065,52.82 115.065,52.82 118.065,52.82 14.565,55.82 17.565,55.82 20.565,55.82 101.565,55.82 104.565,55.82 107.565,55.82 110.565,55.82 113.565,55.82 116.565,55.82 10.065,58.82 16.065,58.82 19.065,58.82 100.065,58.82 103.065,58.82 106.065,58.82 109.065,58.82 112.065,58.82 115.065,58.82 118.065,58.82 5.565,61.82 14.565,61.82 17.565,61.82 20.565,61.82 101.565,61.82 104.565,61.82 107.565,61.82 110.565,61.82 113.565,61.82 116.565,61.82 13.065,64.82 16.065,64.82 19.065,64.82 100.065,64.82 103.065,64.82 106.065,64.82 109.065,64.82 112.065,64.82 115.065,64.82 118.065,64.82 8.565,67.82 11.565,67.82 14.565,67.82 17.565,67.82 20.565,67.82 23.565,67.82 26.565,67.82 29.565,67.82 41.565,67.82 44.565,67.82 47.565,67.82 50.565,67.82 53.565,67.82 56.565,67.82 59.565,67.82 62.565,67.82 65.565,67.82 68.565,67.82 71.565,67.82 74.565,67.82 77.565,67.82 89.565,67.82 92.565,67.82 95.565,67.82 98.565,67.82 101.565,67.82 104.565,67.82 107.565,67.82 110.565,67.82 113.565,67.82 116.565,67.82 37.065,70.82 40.065,70.82 43.065,70.82 46.065,70.82 49.065,70.82 52.065,70.82 55.065,70.82 58.065,70.82 61.065,70.82 64.065,70.82 67.065,70.82 70.065,70.82 73.065,70.82 76.065,70.82 79.065,70.82 82.065,70.82 97.065,70.82 100.065,70.82 103.065,70.82 106.065,70.82 109.065,70.82 112.065,70.82 115.065,70.82 118.065,70.82 35.565,73.82 38.565,73.82 41.565,73.82 44.565,73.82 47.565,73.82 50.565,73.82 53.565,73.82 56.565,73.82 59.565,73.82 62.565,73.82 65.565,73.82 68.565,73.82 71.565,73.82 74.565,73.82 77.565,73.82 80.565,73.82 95.565,73.82 98.565,73.82 101.565,73.82 104.565,73.82 107.565,73.82 110.565,73.82 113.565,73.82 116.565,73.82 37.065,76.82 40.065,76.82 43.065,76.82 46.065,76.82 49.065,76.82 52.065,76.82 55.065,76.82 58.065,76.82 61.065,76.82 64.065,76.82 67.065,76.82 70.065,76.82 73.065,76.82 76.065,76.82 79.065,76.82 82.065,76.82 97.065,76.82 100.065,76.82 103.065,76.82 106.065,76.82 109.065,76.82 112.065,76.82 115.065,76.82 118.065,76.82 35.565,79.82 38.565,79.82 41.565,79.82 44.565,79.82 47.565,79.82 50.565,79.82 53.565,79.82 56.565,79.82 59.565,79.82 62.565,79.82 65.565,79.82 68.565,79.82 71.565,79.82 74.565,79.82 77.565,79.82 80.565,79.82 89.565,79.82 92.565,79.82 95.565,79.82 98.565,79.82 101.565,79.82 104.565,79.82 107.565,79.82 110.565,79.82 113.565,79.82 116.565,79.82 7.065,82.82 10.065,82.82 37.065,82.82 40.065,82.82 43.065,82.82 46.065,82.82 49.065,82.82 52.065,82.82 55.065,82.82 58.065,82.82 61.065,82.82 64.065,82.82 67.065,82.82 70.065,82.82 73.065,82.82 76.065,82.82 79.065,82.82 82.065,82.82 85.065,82.82 88.065,82.82 91.065,82.82 94.065,82.82 97.065,82.82 100.065,82.82 103.065,82.82 106.065,82.82 109.065,82.82 112.065,82.82 115.065,82.82 118.065,82.82 8.565,85.82 17.565,85.82 35.565,85.82 38.565,85.82 41.565,85.82 44.565,85.82 47.565,85.82 50.565,85.82 53.565,85.82 56.565,85.82 59.565,85.82 62.565,85.82 65.565,85.82 68.565,85.82 71.565,85.82 74.565,85.82 77.565,85.82 80.565,85.82 89.565,85.82 92.565,85.82 95.565,85.82 98.565,85.82 101.565,85.82 104.565,85.82 107.565,85.82 110.565,85.82 113.565,85.82 116.565,85.82 22.065,88.82 37.065,88.82 40.065,88.82 43.065,88.82 46.065,88.82 49.065,88.82 52.065,88.82 55.065,88.82 58.065,88.82 61.065,88.82 64.065,88.82 67.065,88.82 70.065,88.82 73.065,88.82 76.065,88.82 79.065,88.82 82.065,88.82 88.065,88.82 91.065,88.82 94.065,88.82 97.065,88.82 100.065,88.82 103.065,88.82 106.065,88.82 109.065,88.82 112.065,88.82 115.065,88.82 118.065,88.82 17.565,91.82 20.565,91.82 35.565,91.82 38.565,91.82 41.565,91.82 44.565,91.82 47.565,91.82 50.565,91.82 53.565,91.82 56.565,91.82 59.565,91.82 62.565,91.82 65.565,91.82 68.565,91.82 71.565,91.82 74.565,91.82 77.565,91.82 80.565,91.82 89.565,91.82 92.565,91.82 95.565,91.82 98.565,91.82 101.565,91.82 104.565,91.82 107.565,91.82 110.565,91.82 113.565,91.82 116.565,91.82 19.065,94.82 22.065,94.82 37.065,94.82 40.065,94.82 43.065,94.82 46.065,94.82 49.065,94.82 52.065,94.82 55.065,94.82 58.065,94.82 61.065,94.82 64.065,94.82 67.065,94.82 70.065,94.82 73.065,94.82 76.065,94.82 79.065,94.82 82.065,94.82 85.065,94.82 88.065,94.82 91.065,94.82 94.065,94.82 97.065,94.82 100.065,94.82 103.065,94.82 106.065,94.82 109.065,94.82 112.065,94.82 115.065,94.82 118.065,94.82 5.565,97.82 8.565,97.82 20.565,97.82 29.565,97.82 32.565,97.82 35.565,97.82 38.565,97.82 41.565,97.82 44.565,97.82 47.565,97.82 50.565,97.82 53.565,97.82 56.565,97.82 59.565,97.82 62.565,97.82 65.565,97.82 68.565,97.82 71.565,97.82 74.565,97.82 77.565,97.82 80.565,97.82 95.565,97.82 98.565,97.82 101.565,97.82 104.565,97.82 107.565,97.82 110.565,97.82 113.565,97.82 116.565,97.82 4.065,100.82 7.065,100.82 37.065,100.82 40.065,100.82 43.065,100.82 46.065,100.82 49.065,100.82 52.065,100.82 55.065,100.82 58.065,100.82 61.065,100.82 64.065,100.82 67.065,100.82 70.065,100.82 73.065,100.82 76.065,100.82 79.065,100.82 82.065,100.82 100.065,100.82 103.065,100.82 106.065,100.82 109.065,100.82 112.065,100.82 115.065,100.82 118.065,100.82 2.565,103.82 5.565,103.82 8.565,103.82 11.565,103.82 14.565,103.82 17.565,103.82 20.565,103.82 26.565,103.82 29.565,103.82 32.565,103.82 35.565,103.82 38.565,103.82 41.565,103.82 44.565,103.82 47.565,103.82 50.565,103.82 53.565,103.82 56.565,103.82 59.565,103.82 62.565,103.82 65.565,103.82 68.565,103.82 71.565,103.82 74.565,103.82 77.565,103.82 80.565,103.82 83.565,103.82 86.565,103.82 89.565,103.82 98.565,103.82 101.565,103.82 104.565,103.82 107.565,103.82 110.565,103.82 113.565,103.82 116.565,103.82 4.065,106.82 7.065,106.82 10.065,106.82 13.065,106.82 16.065,106.82 19.065,106.82 28.065,106.82 31.065,106.82 34.065,106.82 37.065,106.82 40.065,106.82 43.065,106.82 46.065,106.82 49.065,106.82 52.065,106.82 55.065,106.82 67.065,106.82 70.065,106.82 73.065,106.82 76.065,106.82 79.065,106.82 82.065,106.82 85.065,106.82 88.065,106.82 91.065,106.82 100.065,106.82 103.065,106.82 106.065,106.82 109.065,106.82 112.065,106.82 115.065,106.82 118.065,106.82 2.565,109.82 5.565,109.82 8.565,109.82 11.565,109.82 14.565,109.82 17.565,109.82 20.565,109.82 23.565,109.82 32.565,109.82 35.565,109.82 38.565,109.82 41.565,109.82 44.565,109.82 47.565,109.82 50.565,109.82 62.565,109.82 65.565,109.82 68.565,109.82 71.565,109.82 74.565,109.82 77.565,109.82 80.565,109.82 83.565,109.82 86.565,109.82 89.565,109.82 98.565,109.82 101.565,109.82 104.565,109.82 107.565,109.82 110.565,109.82 113.565,109.82 116.565,109.82 4.065,112.82 7.065,112.82 10.065,112.82 13.065,112.82 16.065,112.82 19.065,112.82 22.065,112.82 25.065,112.82 97.065,112.82 100.065,112.82 103.065,112.82 106.065,112.82 109.065,112.82 112.065,112.82 115.065,112.82 118.065,112.82 2.565,115.82 5.565,115.82 8.565,115.82 11.565,115.82 14.565,115.82 17.565,115.82 20.565,115.82 23.565,115.82 26.565,115.82 29.565,115.82 32.565,115.82 35.565,115.82 38.565,115.82 41.565,115.82 44.565,115.82 47.565,115.82 50.565,115.82 53.565,115.82 56.565,115.82 59.565,115.82 62.565,115.82 65.565,115.82 68.565,115.82 71.565,115.82 74.565,115.82 77.565,115.82 80.565,115.82 83.565,115.82 86.565,115.82 89.565,115.82 92.565,115.82 95.565,115.82 98.565,115.82 101.565,115.82 104.565,115.82 107.565,115.82 110.565,115.82 113.565,115.82 116.565,115.82
NetBM1_1: BM1.1 C3.2 C4.1 | length 7.5
  Top Layer w1: C3.2 79.261,64.034 79.541,63.754 83.947,63.754 BM1.1@86.487,63.754
NetBM1_2: BM1.2 C2.2 C3.1 | length 7.6
  Top Layer w1: C3.1 85.818,65.76 86.352,66.294 BM1.2@86.487,66.294
NetBM1_3: BM1.3 C1.2 C2.1 | length 8.2
  Top Layer w1: C1.2 79.134,68.098 79.567,67.665 C2.1 81.42,67.665 82.589,68.834 83.947,68.834 BM1.3@86.487,68.834
NetBM1_4: BM1.4 R1.2 | length 6.7
  Top Layer w1: BM1.4@83.947,71.374 86.487,71.374 90.448,71.374 90.548,71.274 R1.2
NetBM1_5: BM1.5 R2.2 | length 6.6
  Top Layer w1: BM1.5@83.947,73.914 86.487,73.914 R2.2
NetBM1_6: BM1.6 R3.2 | length 6.6
  Top Layer w1: BM1.6@83.947,76.454 86.487,76.454 R3.2
NetBM1_14: BM1.14 R16.2 | length 6.9
  Top Layer w1: BM1.14@83.947,96.774 86.487,96.774 90.265,96.774 90.548,96.491 R16.2
NetBM1_15: BM1.15 R10.2 R16.1 | length 10.9
  Top Layer w1: BM1.15@83.947,99.314 86.487,99.314 R10.2 90.548,99.089 90.648,98.989 90.85,98.989 93.348,96.491 R16.1
NetBM1_16: BM1.16 R12.2 | length 6.6
  Top Layer w1: BM1.16@83.947,101.854 86.487,101.854 R12.2
NetBM1_17: BM1.17 R13.1 | length 6.6
  Top Layer w1: R13.1 26.927,101.754 27.027,101.854 30.9,101.854 BM1.17@33.44,101.854
NetBM1_18: BM1.18 R11.1 | length 6.6
  Top Layer w1: R11.1 26.927,99.214 27.027,99.314 30.9,99.314 BM1.18@33.44,99.314
NetBM1_20: BM1.20 R9.1 | length 6.6
  Top Layer w1: R9.1 26.99,94.17 33.376,94.17 BM1.20@33.44,94.234
NetBM1_21: BM1.21 R8.1 | length 6.6
  Top Layer w1: R8.1 26.927,91.594 27.027,91.694 30.9,91.694 BM1.21@33.44,91.694
NetBM1_22: BM1.22 R7.1 | length 6.6
  Top Layer w1: R7.1 33.121,88.971 33.305,89.154 BM1.22@33.44,89.154
NetBM1_23: BM1.23 R15.1 | length 6.7
  Top Layer w1: R15.1 26.927,86.514 27.027,86.614 30.9,86.614 BM1.23@33.44,86.614
NetBM1_24: BM1.24 R14.1 | length 6.6
  Top Layer w1: R14.1 26.927,83.878 27.027,83.978 33.344,83.978 BM1.24@33.44,84.074
NetBM1_25: BM1.25 R21.1 | length 6.7
  Top Layer w1: R21.1 26.927,81.338 27.027,81.438 33.344,81.438 BM1.25@33.44,81.534
NetBM1_26: BM1.26 R20.1 | length 6.7
  Top Layer w1: R20.1 26.927,78.798 27.027,78.898 33.344,78.898 BM1.26@33.44,78.994
NetBM1_27: BM1.27 R19.1 | length 6.7
  Top Layer w1: R19.1 26.927,76.258 27.027,76.358 33.344,76.358 BM1.27@33.44,76.454
NetBM1_28: BM1.28 R18.1 | length 6.8
  Top Layer w1: R18.1 26.927,73.718 27.027,73.818 33.344,73.818 BM1.28@33.44,73.914
NetBM1_29: BM1.29 R17.1 | length 6.8
  Top Layer w1: R17.1 26.927,71.178 27.027,71.278 33.344,71.278 BM1.29@33.44,71.374
NetBM1_30: BM1.30 C7.2 C8.1 | length 8.5
  Top Layer w1: BM1.30@30.9,68.834 33.44,68.834 33.575,68.834 34.694,67.715 36.272,67.715 C7.2 38.061,67.665 38.595,68.199 C8.1
NetBM1_31: BM1.31 C6.2 C7.1 | length 7.9
  Top Layer w1: BM1.31@30.9,66.294 33.44,66.294 33.575,66.294 34.135,65.734 C6.2
NetBM1_32: BM1.32 C5.2 C6.1 | length 7.8
  Top Layer w1: BM1.32@30.9,63.754 33.44,63.754 38.214,63.754 38.468,64.008 C6.1
NetC15_2: C15.2 R4.2 R5.1 U6.1 | length 8
  Top Layer w0.5: U6.1 6.979,61.477 7.242,61.214 7.242,60.452 ; R4.2 7.242,60.452 ; R5.1 11.684,60.452 7.242,60.452
NetC16_2: C16.2 R6.1 U6.4 | length 5.1
  Top Layer w0.3: U6.4 4.629,63.552 4.904,63.552 5.08,63.728 5.08,63.754 5.207,63.881 5.207,65.408 R6.1 C16.2
NetC25_1: C25.1 C26.1 R26.2 X1.1 X1.4 | length 11.3
  Top Layer w1: R26.2 13.084,76.483 13.184,76.383 13.409,76.383 13.592,76.2 C26.1 ; X1.4 X1.1 16.838,72.852 C26.1 ; C25.1 C26.1
NetR5_2: R5.2 U6.3 | length 5
  Top Layer w0.3: U6.3 11.809,63.377 R5.2
NetR21_2: R21.2 R28.1 R29.2 | length 6.3
  Top Layer w1: R29.2 R28.1 23.96,81.658 24.127,81.491 R21.2
NetR22_1: R22.1 U9.5 | length 6
  Top Layer w0.3: U9.5 16.461,93.853 16.637,94.029 16.637,94.993 R22.1
NetR27_1: R27.1 X1.3 | length 2.5
  Top Layer w1: X1.3 17.072,70.993 R27.1
RST_N: J3.2 R23.2 | length 3.3
  Top Layer w1: R23.2 J3.2
RTS: R20.2 R23.1 R24.2 R25.2 | length 44.8
  Top Layer w1: v2(7.531,73.787) 7.515,73.803 7.515,76.311 R23.1 7.499,79.551 7.76,79.812 8.66,79.812 8.76,79.912 R25.2 8.758,80.138 8.758,82.803 R24.2 ; v2(22.352,78.943) 22.404,78.891 24.027,78.891 24.127,78.791 R20.2
  Bottom Layer w1: v2(7.531,73.787) 7.493,73.749 7.493,70.739 9.144,69.088 24.56,69.088 25.146,69.674 25.146,77.343 23.598,78.891 22.404,78.891 v2(22.352,78.943)
RX: R19.2 U8.4 | length 20.9
  Top Layer w0.6: U8.4 12.319,86.106 13.335,85.09 v2(14.732,85.09)
  Top Layer w1: v2(22.225,76.073) 22.253,76.101 24.099,76.101 R19.2
  Bottom Layer w1: v2(14.732,85.09) 14.732,78.486 17.145,76.073 v2(22.225,76.073)
RX_IN: J1.2 U8.3 | length 8.6
  Top Layer w0.5: J1.2 6.96,91.44 8.128,90.272 8.128,87.503 8.509,87.122 U8.3
TX: R18.2 U9.4 | length 32.7
  Top Layer w0.6: U9.4 15.628,92.903 16.075,92.456 v2(16.256,92.456)
  Top Layer w1: v2(22.225,73.406) 22.298,73.406 22.453,73.561 R18.2
  Bottom Layer w1: v2(16.256,92.456) 16.308,92.404 16.308,92.213 16.383,92.138 16.383,79.197 18.072,77.508 22.841,77.508 23.749,76.6 23.749,75.662 23.846,75.565 23.846,73.94 23.26,73.354 22.277,73.354 v2(22.225,73.406)
TX_IN: J1.3 U9.3 | length 5.4
  Top Layer w0.5: J1.3 4.826,93.853 6.858,93.853 7.808,92.903 U9.3
VDD: BM1.34 C4.2 C5.1 U1.3 U2.3 U3.3 | length 93.7
  Top Layer w1: C5.1 36.462,61.976 36.512,61.926 36.512,61.786 36.957,61.341 36.957,56.134 ; U2.3 51.55,56.122 51.562,56.134 ; 78.232,53.205 81.28,56.253 C4.2
  Top Layer w5: U3.3 25.381,53.205 28.31,56.134 36.957,56.134 51.562,56.134 75.303,56.134 78.232,53.205 78.232,47.301 U1.3
VIN: C9.1 C27.1 J2.1 J2.2 J2.3 U1.1 U2.1 U3.1 U4.3 | length 166.4
  Top Layer w3: 4.572,12.573 4.572,4.17 6.329,2.413 25.146,2.413 ; U3.1 25.381,2.648 25.146,2.413 ; U2.1 51.308,5.996 51.308,2.413 ; U1.1 77.719,2.799 78.105,2.413 ; C27.1 105.41,30.099 102.616,27.305 102.616,13.208 ; J2.3 J2.2 J2.1 105.41,16.002 102.616,13.208 ; 25.146,2.413 51.308,2.413 ; 51.308,2.413 78.105,2.413 ; 78.105,2.413 100.859,2.413 102.616,4.17 102.616,13.208
pads on no net: BM1.7 BM1.8 BM1.9 BM1.10 BM1.11 BM1.12 R7.2 R8.2 R14.2 R15.2 U1.0 U2.0 U3.0

## Polygon pours and split planes (outlines as drawn)
VDD on Top Layer "VDD_L01_P000" (solid, remove dead copper, pour order 0): 21.844,64.643 21.844,41.656 98.298,41.656 98.298,64.643
GND on Top Layer "GND_L01_P003" (solid, remove dead copper, pour order 3): 120.015,120.015 120.015,0.254 0,0.254 0,120.015
VDD on Bottom Layer "VDD_L02_P001" (solid, remove dead copper, pour order 1): 21.844,64.643 21.844,41.656 98.298,41.656 98.298,64.516
GND on Bottom Layer "GND_L02_P002" (solid, remove dead copper, pour order 2): 120.015,120.015 120.015,0.127 0,0.127 0,120.015

## Keep-outs
Keep-Out Layer:
  lines w0.2: 0,0 0,120.015 120.015,120.015 120.015,120 120.015,0.127 0,0.127 0,0

## Text inside footprints (layer, text, board x,y; h text height)
C27: Top Overlay "+" at 110.605,31.349 h2
U1: Top Overlay "LM2596" at 83.025,19.879 h4 r90
U2: Top Overlay "LM2596" at 56.856,19.879 h4 r90
U3: Top Overlay "LM2596" at 30.687,19.879 h4 r90